# EAGLE board can_hub_v1 (EAGLE 6.4)
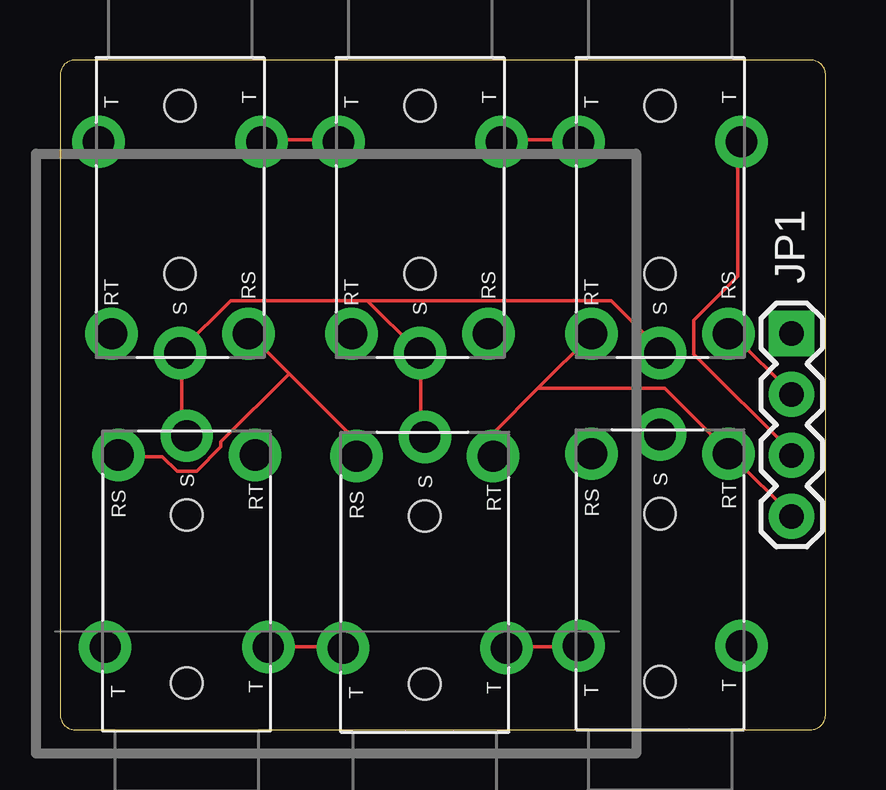
[diagram p0: board, top side]
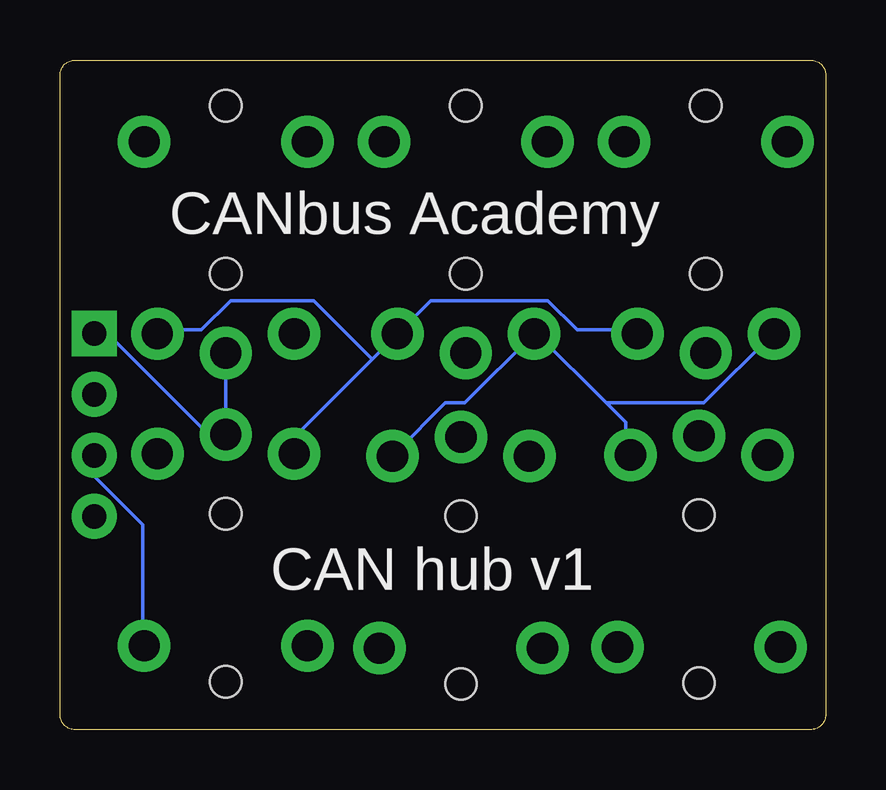
[diagram p1: board, bottom side, seen from below]

Size 31.91 x 27.91 mm. Coordinates in mm from the lower left corner, seen from the top.
Outline: 31.91,0.64 31.91,27.27 arc90 31.27,27.91 0.64,27.91 arc90 0,27.27 0,0.64 arc90 0.64,0 31.27,0 arc90 31.91,0.64
Copper layers (1*16): Top 0.0356mm / dielectric 1.5011mm / Bottom 0.0356mm
Design rules "LaenPCBOrder_RECAP_20pc_restring": minimum track width 6mil, minimum drill 13mil, track to track 6mil, track to pad 6mil, pad to pad 6mil, via to via 6mil, smd to smd 6mil, copper to edge 15mil, drill to drill 6mil, minimum pad ring 7mil, minimum via ring 7mil, stop-mask expansion 4mil, vias tented up to drill 0mil, thermal gap 10mil
vRestrict: area 3.6,1.7 to 6.6,2.5; area 14.8,8.3 to 16.2,9.7; area 16.4,6.5 to 17.2,7.3; area 18.8,6.4 to 19.8,7.4; area 17.4,4.4 to 18.6,5.6; area 0.6,7.8 to 1.9,9; area 11,10.8 to 12,11.7; area 1.2,0.6 to 9.2,2.5; 2 lines

## Footprints (pad centres in the part's own frame; a part is rotated, then mirrored left to right if it is on the bottom)
PJ-30220 = drill 1.3 pad 2.184: P$01 12.3,0; P$02 11.5,2.85; P$03 3.5,-3.4; P$03B 3.5,3.4; P$04 11.5,-2.85 | hole 1.3: 2,0; 9,0
1X04 = drill 1.016 pad 1.88 square: 1 0,0 | drill 1.016 pad 1.88: 2 2.54,0; 3 5.08,0; 4 7.62,0

## Placement (x,y rotation side)
J1  PJ-30220  [PJ-30220]  5,28 270 top
J2  PJ-30220  [PJ-30220]  5.28,-0.05 90 top
J3  PJ-30220  [PJ-30220]  15.2,-0.1 90 top
J4  PJ-30220  [PJ-30220]  15,28 270 top
J5  PJ-30220  [PJ-30220]  25,28 270 top
J6  PJ-30220  [PJ-30220]  25,0 90 top
JP1  [1X04]  30.48,16.51 270 top

## Library data of the parts
J1-J6 = igor_lib_6d4d0; PARTNO: PJ30220
JP1 = SparkFun

## Nets
N$1: J1.P$04 J2.P$04 J3.P$04 J4.P$04 J5.P$04 J6.P$04 JP1.4
N$2: J1.P$03 J1.P$03B J2.P$03 J2.P$03B J3.P$03 J3.P$03B J4.P$03 J4.P$03B J5.P$03 J5.P$03B J6.P$03 J6.P$03B JP1.3
N$3: J1.P$02 J2.P$02 J3.P$02 J4.P$02 J5.P$02 J6.P$02 JP1.2
N$4: J1.P$01 J2.P$01 J3.P$01 J4.P$01 J5.P$01 J6.P$01 JP1.1

## Tracks (layer width: path | path; a pad name or v marks a point on that pad's centre or on a via)
N$1
  Top 0.152: JP1.4 30.48,8.94 28.04,11.38 J6.P$04 27.84,11.58 25.2,14.22 19.91,14.22 | 19.91,14.22 22.15,16.46 J5.P$04 | 19.91,14.22 18.09,12.39 18.09,11.58 J3.P$04
  Bottom 0.152: 9.14,13.61 11.99,16.46 J4.P$04 12.19,16.46 15.04,13.61 15.85,13.61 17.88,11.58 J3.P$04 | 9.14,13.61 8.33,12.8 8.33,11.58 J2.P$04 | 9.14,13.61 5.08,13.61 2.23,16.46 J1.P$04
N$2
  Top 0.152: J1.P$03B 8.53,24.59 11.58,24.59 J4.P$03 | J5.P$03 21.54,24.59 18.49,24.59 J4.P$03B | J2.P$03 8.74,3.45 11.79,3.45 J3.P$03B | J6.P$03B 21.54,3.45 18.69,3.45 J3.P$03 | J5.P$03B 28.25,24.38 28.25,18.9 26.42,17.07 26.42,15.65 30.48,11.58 JP1.3
  Bottom 0.152: JP1.3 30.48,10.57 28.45,8.53 28.45,3.66 J6.P$03
N$3
  Top 0.152: 9.55,14.83 7.92,16.46 J1.P$02 | 9.55,14.83 12.19,12.19 12.19,11.58 J3.P$02 | 9.55,14.83 6.71,11.99 6.71,11.79 5.69,10.77 4.88,10.77 4.27,11.38 2.44,11.38 J2.P$02 | JP1.2 30.48,14.02 28.04,16.46 J5.P$02
  Bottom 0.152: 18.9,15.44 17.88,16.46 J4.P$02 17.68,16.66 16.46,17.88 11.58,17.88 10.36,16.66 7.92,16.66 J1.P$02 | 18.9,15.44 22.15,12.19 22.15,11.58 J6.P$02 | 18.9,15.44 21.34,17.88 24.79,17.88 26.01,16.66 27.84,16.66 J5.P$02
N$4
  Top 0.152: J3.P$01 15.04,12.39 15.04,15.65 J4.P$01 14.83,15.85 12.8,17.88 | J2.P$01 5.08,12.39 5.08,15.65 J1.P$01 5.08,15.85 7.11,17.88 12.8,17.88 | 12.8,17.88 22.96,17.88 24.99,15.85 J5.P$01
  Bottom 0.152: JP1.1 30.48,16.46 29.87,16.46 25.81,12.39 25.2,12.39 J6.P$01 24.99,12.39 24.99,15.65 J5.P$01

## Text on the board
bNames: CANbus Academy | CAN hub v1
tDocu: pcb fab house min restring 8mm